# EAGLE board raspi (EAGLE 6.3)

Size 14.91 x 30.47 mm. Coordinates in mm from the lower left corner, seen from the top.
Outline: 0,0 14.91,0 14.91,30.47 0,30.47 0,0
Copper layers (1*16): Top 0.035mm / dielectric 1.5mm / Bottom 0.035mm
Design rules "default": minimum track width 10mil, minimum drill 24mil, track to track 8mil, track to pad 8mil, pad to pad 8mil, via to via 8mil, smd to smd 8mil, copper to edge 40mil, drill to drill 8mil, minimum pad ring 10mil, minimum via ring 8mil, stop-mask expansion 4mil, vias tented up to drill 0mil, thermal gap 10mil

## Footprints (pad centres in the part's own frame; a part is rotated, then mirrored left to right if it is on the bottom)
2X05 = drill 1.016 octagon: 1 -5.08,-1.27; 2 -5.08,1.27; 3 -2.54,-1.27; 4 -2.54,1.27; 5 0,-1.27; 6 0,1.27; 7 2.54,-1.27; 8 2.54,1.27; 9 5.08,-1.27; 10 5.08,1.27
1X05 = drill 1.016 long: 1 -5.08,0; 2 -2.54,0; 3 0,0; 4 2.54,0; 5 5.08,0
SD4-01 = drill 0.813 long: 1 0,-3.81; 2 0,3.81
RFM70 = smd 0.85 x 1.5: CE 2.5,-14.3; CSN 3.8,-14.3; GND -0.1,-14.3; IRQ 9,-14.3; MISO 7.7,-14.3; MOSI 6.4,-14.3; SCK 5.1,-14.3; VDD 1.2,-14.3
SSOP20 = smd 0.4 x 1.5: 1 -2.925,-3.625; 2 -2.275,-3.625; 3 -1.625,-3.625; 4 -0.975,-3.625; 5 -0.325,-3.625; 6 0.325,-3.625; 7 0.975,-3.625; 8 1.625,-3.625; 9 2.275,-3.625; 10 2.925,-3.625; 11 2.925,3.625; 12 2.275,3.625; 13 1.625,3.625; 14 0.975,3.625; 15 0.325,3.625; 16 -0.325,3.625; 17 -0.975,3.625; 18 -1.625,3.625; 19 -2.275,3.625; 20 -2.925,3.625

## Placement (x,y rotation side)
JP1  Raspi  [2X05]  7.5,3.19 0 top
JP2  Prog  [1X05]  1.55,12.85 90 top
S1  [SD4-01]  2.29,24.53 0 top
U$1  RFM70  [RFM70]  19.33,18.48 90 bottom
U$2  PIC16F690  [SSOP20]  10.16,11.45 0 bottom

## Library data of the parts
JP1 JP2 = pinhead
S1 = switch-dil; OC_FARNELL: unknown; OC_NEWARK: unknown
U$1 = rfm70
U$2 = microchip

## Nets
N$1: S1.2 U$2.2
N$5: JP1.6 JP2.3 S1.1 U$1.GND U$2.20
N$12: U$1.MISO U$2.13
N$16: U$1.CE U$2.17
N$17: JP1.1 JP2.2 U$1.VDD U$2.1
N$18: JP2.4 U$2.19
N$19: JP2.5 U$2.18
N$20: U$1.CSN U$2.16
N$21: U$1.IRQ U$2.14
N$22: U$1.SCK U$2.11
N$23: U$1.MOSI U$2.9
N$25: JP2.1 U$2.4
N$28: U$2.8
N$29: U$2.5
N$30: U$2.6
N$31: U$2.7
N$33: JP1.10 U$2.10
N$34: JP1.8 U$2.12

## Tracks (layer width: path | path; a pad name or v marks a point on that pad's centre or on a via)
N$1  (1 unrouted)
N$5  (4 unrouted)
N$12  (1 unrouted)
N$16  (1 unrouted)
N$17  (3 unrouted)
N$18  (1 unrouted)
N$19  (1 unrouted)
N$20  (1 unrouted)
N$21  (1 unrouted)
N$22  (1 unrouted)
N$23  (1 unrouted)
N$25  (1 unrouted)
N$33  (1 unrouted)
N$34  (1 unrouted)